# EAGLE board Projet electronique - PIC-PIR - Groupe 5 (EAGLE 9.6.2)
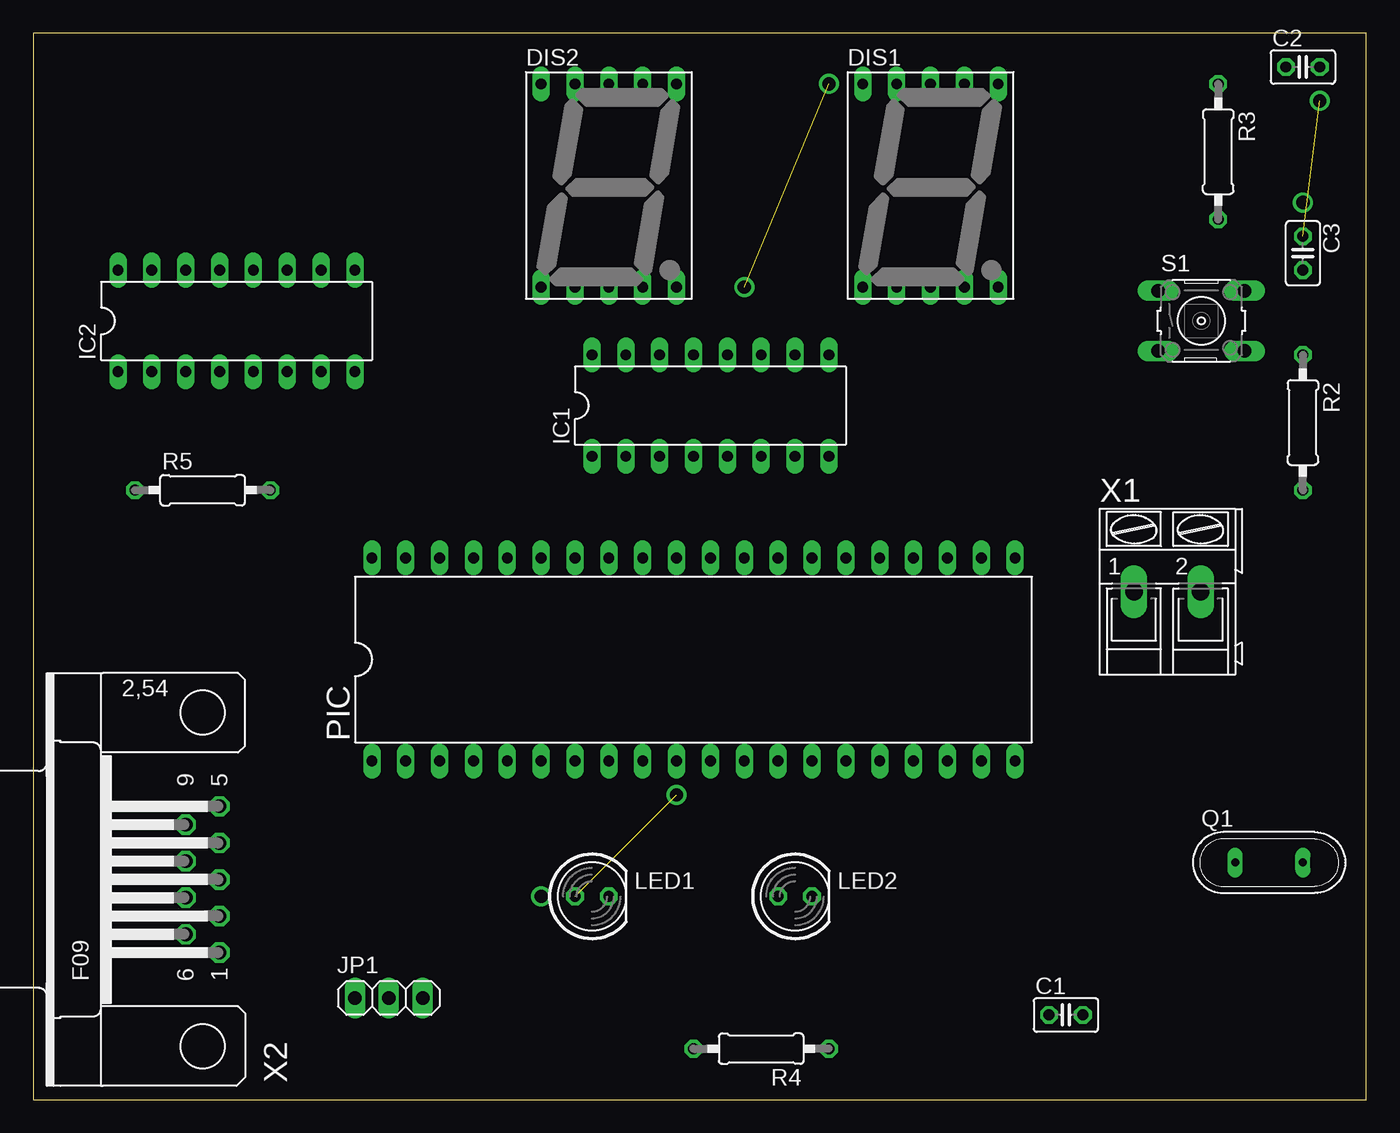
[diagram p0: board, top side]
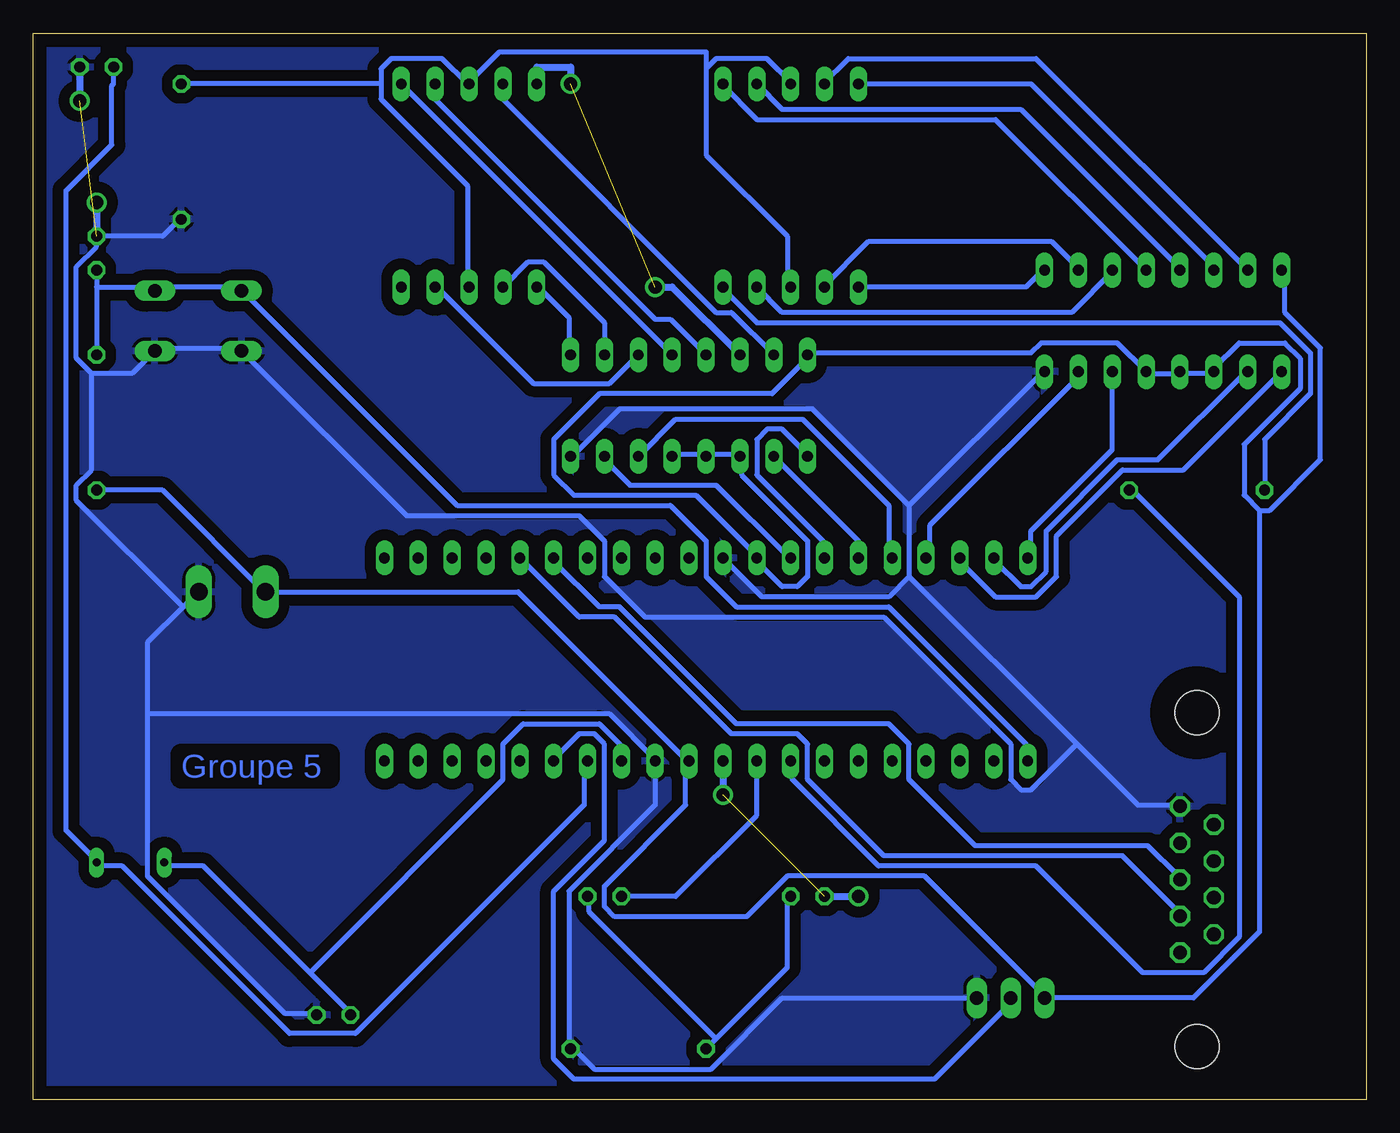
[diagram p1: board, bottom side, seen from below]

Size 100 x 80 mm. Coordinates in mm from the lower left corner, seen from the top.
Outline: 0,0 100,0 100,80 0,80 0,0
Copper layers (1*16): Top 0.035mm / dielectric 1.5mm / Bottom 0.035mm
Design rules "default *": minimum track width 15mil, minimum drill 0.35mm, track to track 15mil, track to pad 15mil, pad to pad 15mil, via to via 15mil, smd to smd 6mil, copper to edge 40mil, drill to drill 6mil, minimum pad ring 10mil, minimum via ring 8mil, stop-mask expansion 4mil, vias tented up to drill 0mil, thermal gap 10mil

## Footprints (pad centres in the part's own frame; a part is rotated, then mirrored left to right if it is on the bottom)
C025-025X050 = drill 0.813 octagon: 1 -1.27,0; 2 1.27,0
HDSP-M = drill 0.813 long: 1 -5.08,-7.62; 2 -2.54,-7.62; 3 0,-7.62; 4 2.54,-7.62; 5 5.08,-7.62; 6 5.08,7.62; 7 2.54,7.62; 8 0,7.62; 9 -2.54,7.62; 10 -5.08,7.62
DIL16 = drill 0.813 long: 1 -8.89,-3.81; 2 -6.35,-3.81; 3 -3.81,-3.81; 4 -1.27,-3.81; 5 1.27,-3.81; 6 3.81,-3.81; 7 6.35,-3.81; 8 8.89,-3.81; 9 8.89,3.81; 10 6.35,3.81; 11 3.81,3.81; 12 1.27,3.81; 13 -1.27,3.81; 14 -3.81,3.81; 15 -6.35,3.81; 16 -8.89,3.81
1X03 = drill 1.016 long: 1 -2.54,0; 2 0,0; 3 2.54,0
LED5MM = drill 0.813 octagon: A -1.27,0; K 1.27,0
DIL40 = drill 0.813 long: 1 -24.13,-7.62; 2 -21.59,-7.62; 3 -19.05,-7.62; 4 -16.51,-7.62; 5 -13.97,-7.62; 6 -11.43,-7.62; 7 -8.89,-7.62; 8 -6.35,-7.62; 9 -3.81,-7.62; 10 -1.27,-7.62; 11 1.27,-7.62; 12 3.81,-7.62; 13 6.35,-7.62; 14 8.89,-7.62; 15 11.43,-7.62; 16 13.97,-7.62; 17 16.51,-7.62; 18 19.05,-7.62; 19 21.59,-7.62; 20 24.13,-7.62; 21 24.13,7.62; 22 21.59,7.62; 23 19.05,7.62; 24 16.51,7.62; 25 13.97,7.62; 26 11.43,7.62; 27 8.89,7.62; 28 6.35,7.62; 29 3.81,7.62; 30 1.27,7.62; 31 -1.27,7.62; 32 -3.81,7.62; 33 -6.35,7.62; 34 -8.89,7.62; 35 -11.43,7.62; 36 -13.97,7.62; 37 -16.51,7.62; 38 -19.05,7.62; 39 -21.59,7.62; 40 -24.13,7.62
QS = drill 0.61 long: 1 -2.54,0; 2 2.54,0
0207/10 = drill 0.813 octagon: 1 -5.08,0; 2 5.08,0
B3F-10XX = drill 1.016 long: 1 -3.251,2.261; 2 3.251,2.261; 3 -3.251,-2.261; 4 3.251,-2.261
AK300/2 = drill 1.321 long: 1 -2.515,0; 2 2.489,0
F09H = drill 1.016 octagon: 1 -5.486,-1.27; 2 -2.743,-1.27; 3 0,-1.27; 4 2.743,-1.27; 5 5.486,-1.27; 6 -4.115,1.27; 7 -1.372,1.27; 8 1.372,1.27; 9 4.115,1.27 | hole 3.302: -12.522,0; 12.522,0

## Placement (x,y rotation side)
C1  [C025-025X050]  77.47,6.35 0 top
C2  [C025-025X050]  95.25,77.47 0 top
C3  [C025-025X050]  95.25,63.5 270 top
DIS1  HD-H103  [HDSP-M]  67.31,68.58 0 top
DIS2  HD-H103  [HDSP-M]  43.18,68.58 0 top
IC1  4511N  [DIL16]  50.8,52.07 0 top
IC2  4511N  [DIL16]  15.24,58.42 0 top
JP1  [1X03]  26.67,7.62 0 top
LED1  [LED5MM]  41.91,15.24 0 top
LED2  [LED5MM]  57.15,15.24 0 top
PIC  PIC16F877P  [DIL40]  49.53,33.02 0 top
Q1  [QS]  92.71,17.78 0 top
R2  [0207/10]  95.25,50.8 270 top
R3  [0207/10]  88.9,71.12 270 top
R4  [0207/10]  54.61,3.81 180 top
R5  [0207/10]  12.7,45.72 0 top
S1  [B3F-10XX]  87.63,58.42 0 top
X1  [AK300/2]  85.09,38.1 0 top
X2  [F09H]  12.7,16.51 90 top

## Library data of the parts
C1-C3 = rcl; SPICEPREFIX: C
DIS1 DIS2 = display-hp; OC_FARNELL: unknown; OC_NEWARK: unknown
IC1 IC2 = 45xx
JP1 = pinhead
LED1 LED2 = led
PIC = microchip; MF: MICROCHIP; MPN: PIC16F877-04/P; OC_FARNELL: 9761349; OC_NEWARK: 61K3463
Q1 = special
R2-R5 = rcl; SPICEPREFIX: R
S1 = switch-omron; MPN: B3F-1000; OC_FARNELL: 176432; OC_NEWARK: 36M3542
X1 = con-ptr500; OC_FARNELL: unknown; OC_NEWARK: unknown
X2 = con-subd; OC_FARNELL: unknown; OC_NEWARK: unknown

## Nets
GND: C1.2 C2.2 C3.1 IC1.8 IC2.8 JP1.3 PIC.12 PIC.31 R3.2 R4.1 S1.3 S1.4 X1.2 X2.5
N$1: C2.1 PIC.14 Q1.2
N$2: C1.1 PIC.13 Q1.1
N$3: C3.2 PIC.1 R2.1 S1.1 S1.2
N$4: IC1.7 PIC.33
N$5: IC1.1 PIC.34
N$6: IC1.2 PIC.35
N$7: IC1.6 PIC.36
N$8: IC2.7 PIC.37
N$9: IC2.1 PIC.38
N$10: IC2.2 PIC.39
N$11: IC2.6 PIC.40
N$12: DIS1.7 IC1.13
N$13: DIS1.6 IC1.12
N$14: DIS1.4 IC1.11
N$15: DIS1.2 IC1.10
N$16: DIS1.1 IC1.9
N$17: DIS1.9 IC1.15
N$18: DIS1.10 IC1.14
N$19: DIS2.7 IC2.13
N$20: DIS2.6 IC2.12
N$21: DIS2.4 IC2.11
N$22: DIS2.2 IC2.10
N$23: DIS2.1 IC2.9
N$24: DIS2.9 IC2.15
N$25: DIS2.10 IC2.14
N$26: DIS1.3 DIS1.8 DIS2.3 DIS2.8 R3.1
N$27: LED1.K LED2.K R4.2
N$28: DIS2.5 R5.1
RC0: JP1.2 PIC.15
RE0: PIC.8 R5.2
RE1: LED2.A PIC.9
RE2: LED1.A PIC.10
RX: PIC.26 X2.3
TX: PIC.25 X2.2
VCC: IC1.3 IC1.4 IC1.5 IC1.16 IC2.3 IC2.4 IC2.5 IC2.16 JP1.1 PIC.11 PIC.32 R2.2 X1.1

## Tracks (layer width: path | path; a pad name or v marks a point on that pad's centre or on a via)
GND  (1 unrouted)
  Bottom 0.381: PIC.31 45.34,37.72 35.81,37.72 34.29,39.24 | 34.29,44.58 34.29,39.24 | 34.29,44.58 24.38,54.48 IC2.8 | 34.29,44.58 41.53,51.82 56.01,51.82 59.44,48.39 IC1.8 | 34.29,39.24 21.72,26.67 | 21.72,26.67 17.14,22.1 14.1,22.1 X2.5 | JP1.3 43.81,7.62 49.15,2.29 57.91,2.29 59.44,3.81 R4.1 59.82,3.81 59.82,15.62 53.34,22.1 PIC.12 53.34,25.53 56.77,28.96 91.44,28.96 | R3.2 89.15,65.91 90.3,64.77 C3.1 95.25,64.01 96.77,62.48 96.77,55.63 95.63,54.48 | 95.63,54.48 92.58,54.48 91.06,56.01 S1.4 90.68,56.39 84.58,56.39 S1.3 84.2,56.01 72.01,43.81 59.05,43.81 57.15,41.91 57.15,39.24 54.1,36.2 36.2,36.2 26.67,26.67 26.67,24 25.91,23.24 25.15,23.24 21.72,26.67 | 91.44,28.96 91.44,34.29 88.77,36.96 | 91.44,28.96 91.44,16.76 81.15,6.48 78.87,6.48 C1.2 | 88.77,36.96 87.63,38.1 X1.2 | 95.63,54.48 95.63,47.24 96.77,46.1 96.77,44.96 88.77,36.96
  Bottom 0.508: C2.2 96.52,74.93
  pour Bottom (isolate 0.813): 0,80.01 100.33,80.01 100.33,0 0,0
N$1
  Bottom 0.381: PIC.14 58.67,25.15 58.67,22.1 75.82,4.95 80.77,4.95 93.34,17.53 95.25,17.53 Q1.2 95.25,17.91 97.54,20.19 97.54,68.2 94.11,71.63 94.11,76.07 93.98,76.2 C2.1
N$2
  Bottom 0.381: 79.25,9.53 76.2,6.48 C1.1 | 79.25,9.53 87.25,17.53 89.92,17.53 Q1.1 | 79.25,9.53 64.77,24 64.77,26.67 63.25,28.19 57.53,28.19 56.01,26.67 56.01,25.53 PIC.13
N$3
  Bottom 0.381: C3.2 95.25,60.96 | 95.25,60.96 R2.1 | 95.25,60.96 91.06,60.96 S1.2 90.68,60.96 84.58,60.96 S1.1 84.2,60.58 68.2,44.58 52.2,44.58 49.53,41.91 49.53,39.24 47.24,36.96 35.81,36.96 25.53,26.67 25.53,25.53 PIC.1
N$4
  Bottom 0.381: PIC.33 43.43,40.77 48.77,46.1 55.24,46.1 57.15,48.01 IC1.7
N$5
  Bottom 0.381: PIC.34 40.77,40.77 40.77,41.91 45.72,46.86 45.72,49.53 44.96,50.29 43.81,50.29 41.91,48.39 IC1.1
N$6
  Bottom 0.381: PIC.35 38.1,41.91 IC1.2
N$7
  Bottom 0.381: IC1.6 51.82,51.05 42.29,51.05 35.81,44.58 35.81,40.77 PIC.36
N$8
  Bottom 0.381: PIC.37 32.77,40.77 32.77,43.05 21.34,54.48 IC2.7
N$9
  Bottom 0.381: IC2.1 13.72,47.24 18.29,47.24 23.24,42.29 23.24,39.24 24.77,37.72 27.81,37.72 30.48,40.39 PIC.38
N$10
  Bottom 0.381: IC2.2 9.14,54.48 15.62,48.01 18.67,48.01 24,42.67 24,39.62 25.15,38.48 25.91,38.48 27.81,40.39 PIC.39
N$11
  Bottom 0.381: IC2.6 19.05,48.77 25.15,42.67 25.15,40.77 PIC.40
N$12
  Bottom 0.381: DIS1.7 69.85,75.06 53.34,58.55 52.2,58.55 IC1.13
N$13
  Bottom 0.381: DIS1.6 IC1.12
N$14
  Bottom 0.381: IC1.11 56.77,53.72 62.48,53.72 69.72,60.96 DIS1.4
N$15
  Bottom 0.381: IC1.10 57.15,58.29 61.72,62.87 62.87,62.87 DIS1.2
N$16
  Bottom 0.381: IC1.9 59.82,56.01 59.82,58.67 62.1,60.96 DIS1.1
N$17
  Bottom 0.381: IC1.15 47.62,59.05 48.77,59.05 64.77,75.06 DIS1.9
N$18  (1 unrouted)
  Bottom 0.508: 53.34,60.96 52.07,60.96 IC1.14 | DIS1.10 62.23,77.47 59.69,77.47 59.69,76.2
N$19
  Bottom 0.381: DIS2.7 43.81,74.3 25.91,74.3 14.1,62.48 IC2.13
N$20
  Bottom 0.381: IC2.12 27.81,73.53 45.72,73.53 48.39,76.2 DIS2.6
N$21
  Bottom 0.381: DIS2.4 43.81,59.05 22.1,59.05 19.05,62.1 IC2.11
N$22
  Bottom 0.381: IC2.10 21.72,62.48 23.62,64.39 37.34,64.39 40.77,60.96 DIS2.2
N$23
  Bottom 0.381: DIS2.1 25.53,60.96 24.38,62.1 IC2.9
N$24
  Bottom 0.381: IC2.15 24.77,78.11 38.86,78.11 40.77,76.2 DIS2.9
N$25
  Bottom 0.381: DIS2.10 25.15,76.2 11.43,62.48 IC2.14
N$26
  Bottom 0.381: 49.53,77.34 49.53,78.61 65.02,78.61 67.44,76.2 | 49.53,77.34 49.53,70.87 43.43,64.77 43.43,60.96 DIS2.3 | 49.53,77.34 48.77,78.11 44.96,78.11 43.05,76.2 DIS2.8 | 73.91,76.2 73.91,77.34 73.15,78.11 69.34,78.11 67.44,76.2 | 73.91,76.2 73.91,75.06 67.44,68.58 67.44,60.96 DIS1.3 | 73.91,76.2 R3.1 | 67.44,76.2 DIS1.8
N$27
  Bottom 0.381: R4.2 48.77,4.57 | 48.77,4.57 43.43,9.91 43.43,15.24 LED1.K | 48.77,4.57 58.29,14.1 58.29,15.24 LED2.K
N$28
  Bottom 0.381: R5.1 7.62,49.53 4.19,52.96 4.19,56.01 6.48,58.29 45.72,58.29 48.39,60.96 DIS2.5
N$29  (via drill 1 pad 1.3)
  other vias: 59.69,76.2
N$30  (via drill 1 pad 1.3)
  other vias: 96.52,74.93
N$31  (via drill 1 pad 1.3)
  other vias: 38.1,15.24
N$32  (via drill 1 pad 1.3)
  other vias: 48.26,22.86
N$33  (via drill 1 pad 1.3)
  other vias: 53.34,60.96
N$34  (via drill 1 pad 1.3)
  Bottom 0.508: v95.25,67.31 95.25,64.77
RC0
  Bottom 0.381: JP1.2 26.67,7.24 32.38,1.52 59.44,1.52 60.96,3.05 60.96,15.62 57.15,19.43 57.15,26.67 57.91,27.43 59.05,27.43 60.96,25.53 PIC.15
RE0
  Bottom 0.381: PIC.8 43.05,25.15 43.05,24 36.58,17.53 24.77,17.53 16.76,9.53 12.19,9.53 9.53,12.19 9.53,37.72 17.53,45.72 R5.2
RE1
  Bottom 0.381: PIC.9 45.72,21.34 51.82,15.24 LED2.A
RE2  (1 unrouted)
  Bottom 0.508: LED1.A 38.1,15.24 | PIC.10 48.26,22.86
RX
  Bottom 0.381: PIC.26 60.96,40.39 57.53,36.96 56.01,36.96 47.24,28.19 35.81,28.19 34.29,26.67 34.29,24 29.34,19.05 16.38,19.05 14.1,16.76 X2.3
TX
  Bottom 0.381: PIC.25 59.05,36.2 56.39,36.2 47.62,27.43 42.67,27.43 41.91,26.67 41.91,24 36.2,18.29 18.29,18.29 14.1,14.1 X2.2
VCC
  Bottom 0.381: R2.2 90.3,45.72 82.68,38.1 X1.1 63.63,38.1 51.05,25.53 PIC.11 51.05,25.15 51.05,22.1 57.15,16 57.15,14.48 56.39,13.72 46.48,13.72 43.43,16.76 33.15,16.76 24,7.62 | 49.53,48.39 47.24,48.39 IC1.3 46.86,48.01 46.86,46.86 41.91,41.91 41.91,39.24 42.67,38.48 43.81,38.48 45.72,40.39 PIC.32 45.72,40.77 50.29,45.34 59.44,45.34 60.96,46.86 60.96,49.53 57.53,52.96 44.58,52.96 41.91,55.63 IC1.16 41.91,56.01 25.15,56.01 24.38,56.77 18.67,56.77 IC2.5 16.38,54.48 14.1,54.48 IC2.4 13.72,54.48 11.43,54.48 IC2.3 11.43,54.86 9.53,56.77 6.1,56.77 4.95,55.63 4.95,53.34 9.14,49.15 9.14,45.34 8,44.2 | 49.53,48.39 51.82,48.39 IC1.5 | 49.53,48.39 IC1.4 | 8,44.2 7.24,44.2 3.43,48.01 3.43,56.39 6.1,59.05 6.1,62.1 IC2.16 | 24,7.62 12.95,7.62 8,12.57 8,44.2 | 24,7.62 JP1.1

## Text on the board
Bottom: Groupe 5